# EAGLE board mjoy (EAGLE 4.16)
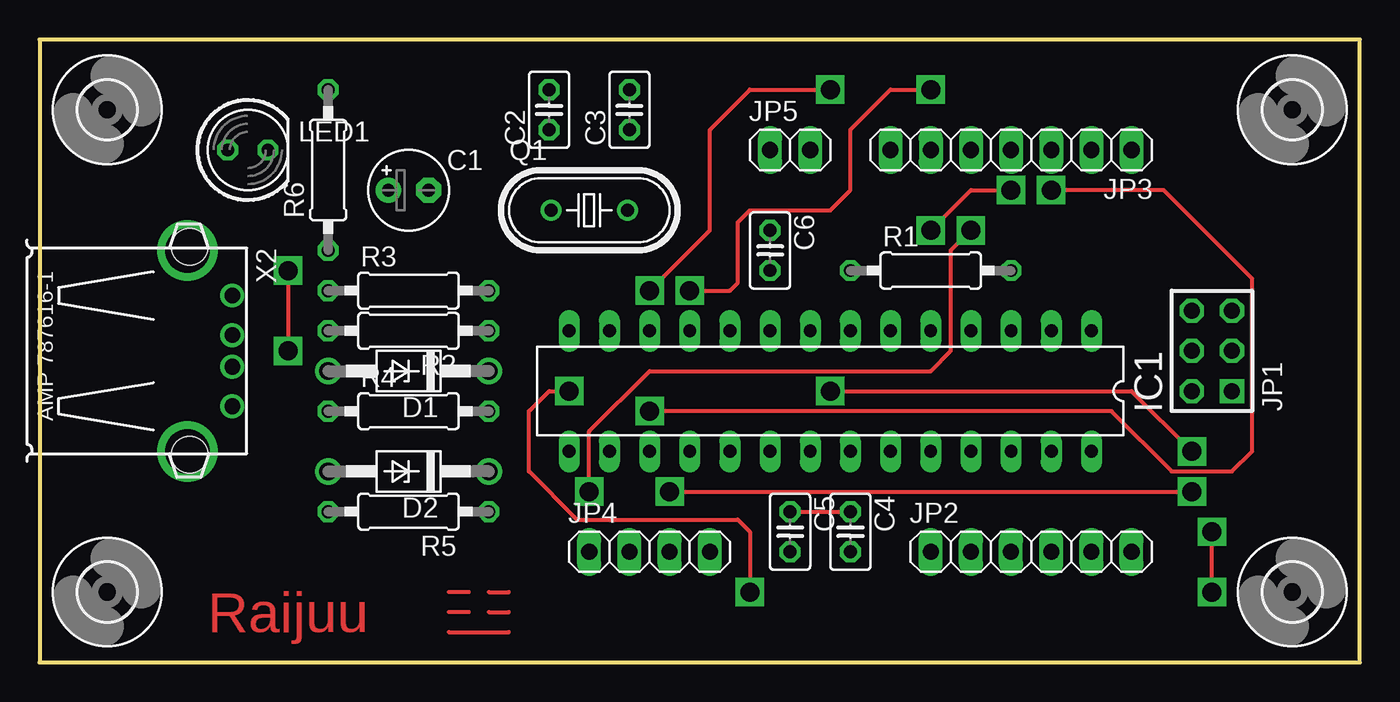
[diagram p0: board, top side]
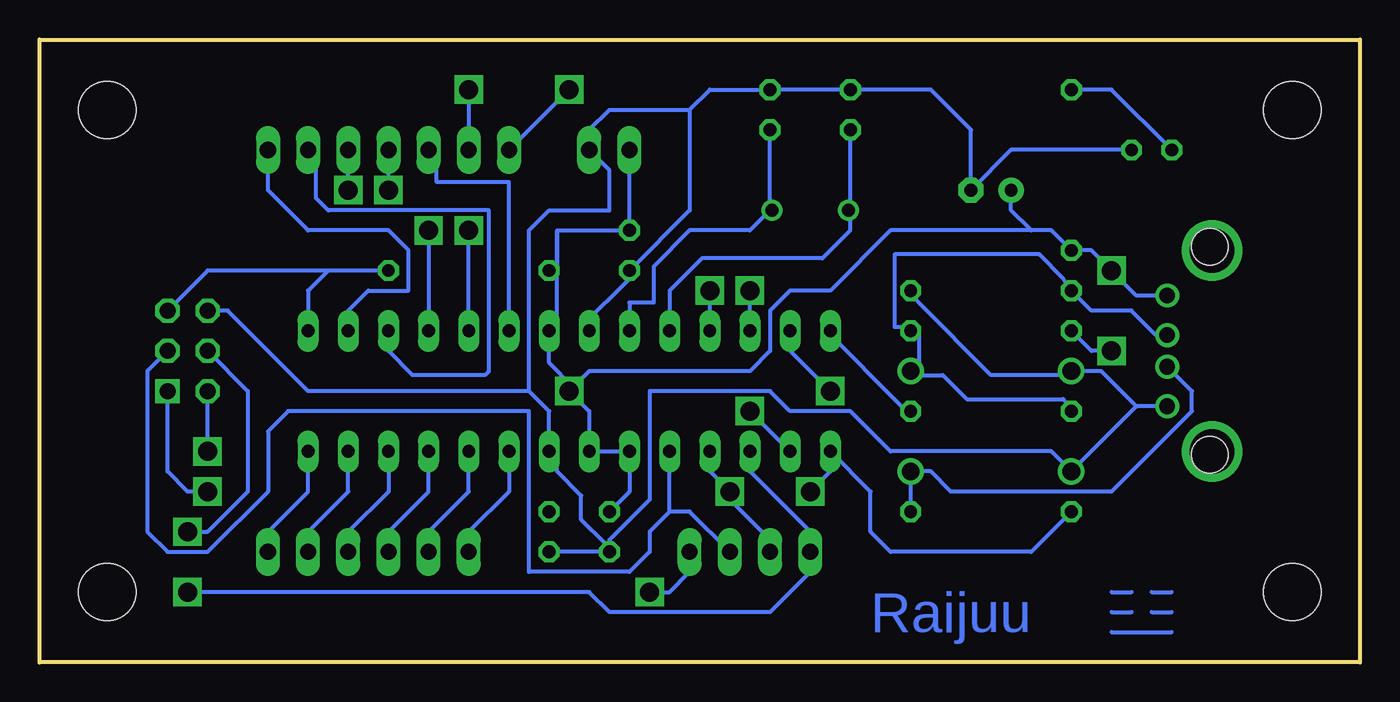
[diagram p1: board, bottom side, seen from below]

Size 83.49 x 39.36 mm. Coordinates in mm from the lower left corner, seen from the top.
Outline: 0,0 83.49,0 83.49,39.36 0,39.36 0,0
Copper layers (1*16): Top 0.035mm / dielectric 1.5mm / Bottom 0.035mm
Design rules "default": minimum track width 10mil, minimum drill 24mil, track to track 8mil, track to pad 8mil, pad to pad 8mil, via to via 8mil, smd to smd 8mil, copper to edge 40mil, drill to drill 8mil, minimum pad ring 10mil, minimum via ring 8mil, stop-mask expansion 4mil, vias tented up to drill 0mil, thermal gap 10mil

## Footprints (pad centres in the part's own frame; a part is rotated, then mirrored left to right if it is on the bottom)
E2,5-5 = drill 0.813 pad 1.6 round: + -1.27,0 | drill 0.813 pad 1.6 octagon: - 1.27,0
C025-025X050 = drill 0.813 octagon: 1 -1.27,0; 2 1.27,0
DO41Z10 = drill 1.118 round: A 5.08,0; C -5.08,0
DIL28-3 = drill 0.813 long: 1 -16.51,-3.81; 2 -13.97,-3.81; 3 -11.43,-3.81; 4 -8.89,-3.81; 5 -6.35,-3.81; 6 -3.81,-3.81; 7 -1.27,-3.81; 8 1.27,-3.81; 9 3.81,-3.81; 10 6.35,-3.81; 11 8.89,-3.81; 12 11.43,-3.81; 13 13.97,-3.81; 14 16.51,-3.81; 15 16.51,3.81; 16 13.97,3.81; 17 11.43,3.81; 18 8.89,3.81; 19 6.35,3.81; 20 3.81,3.81; 21 1.27,3.81; 22 -1.27,3.81; 23 -3.81,3.81; 24 -6.35,3.81; 25 -8.89,3.81; 26 -11.43,3.81; 27 -13.97,3.81; 28 -16.51,3.81
AVR-ISP-6 = drill 1.016 square: 1 -2.54,-1.27 | drill 1.016 octagon: 2 -2.54,1.27; 3 0,-1.27; 4 0,1.27; 5 2.54,-1.27; 6 2.54,1.27
1X06 = drill 1.016 long: 1 -6.35,0; 2 -3.81,0; 3 -1.27,0; 4 1.27,0; 5 3.81,0; 6 6.35,0
1X07 = drill 1.016 long: 1 -7.62,0; 2 -5.08,0; 3 -2.54,0; 4 0,0; 5 2.54,0; 6 5.08,0; 7 7.62,0
1X04 = drill 1.016 long: 1 -3.81,0; 2 -1.27,0; 3 1.27,0; 4 3.81,0
1X02 = drill 1.016 long: 1 -1.27,0; 2 1.27,0
LED5MM = drill 0.813 octagon: A -1.27,0; K 1.27,0
HC49U70 = drill 0.813 round: 1 -2.413,0; 2 2.413,0
0207/10 = drill 0.813 octagon: 1 -5.08,0; 2 5.08,0
3,6 = hole 3.6: 0,0
USB = drill 1 round: 1 -3.5,12.99; 2 -1,12.99; 3 1,12.99; 4 3.5,12.99 | hole 2.3: -6.57,10.28; 6.57,10.28

## Placement (x,y rotation side)
C1  10uF  [E2,5-5]  23.33,29.84 0 top
C2  15pF  [C025-025X050]  32.22,34.92 90 top
C3  15pF  [C025-025X050]  37.3,34.92 90 top
C4  0.1uF  [C025-025X050]  51.27,8.25 270 top
C5  0.1uF  [C025-025X050]  47.46,8.25 270 top
C6  0.1uF  [C025-025X050]  46.19,26.03 270 top
D1  3.3V  [DO41Z10]  23.33,18.41 180 top
D2  3.3V  [DO41Z10]  23.33,12.06 180 top
IC1  MEGA8-P  [DIL28-3]  50,17.14 180 top
JP1  AVR-ISP-6  [AVR-ISP-6]  74.13,19.68 90 top
JP2  [1X06]  62.7,6.98 0 top
JP3  [1X07]  61.43,32.38 180 top
JP4  [1X04]  38.57,6.98 0 top
JP5  [1X02]  47.46,32.38 0 top
LED1  [LED5MM]  13.17,32.38 0 top
Q1  12MHz  [HC49U70]  34.76,28.57 0 top
R1  10K  [0207/10]  56.35,24.76 0 top
R2  2.2K  [0207/10]  23.33,20.95 180 top
R3  4.7K  [0207/10]  23.33,23.49 0 top
R4  82  [0207/10]  23.33,15.87 0 top
R5  82  [0207/10]  23.33,9.52 180 top
R6  1K  [0207/10]  18.25,31.11 90 top
U$1  [3,6]  4.28,4.44 0 top
U$2  [3,6]  79.21,34.92 0 top
U$3  [3,6]  4.28,34.92 0 top
U$4  [3,6]  79.21,4.44 0 top
X2  [USB]  -0.8,19.68 270 top

## Library data of the parts
C1-C6 R1-R6 = rcl
D1 D2 = diode
IC1 = atmel
JP1 = atmel-1
JP2-JP5 = pinhead
LED1 U$1-U$4 = Basic
Q1 = crystal
X2 = con-amp

## Nets
+5V: C1.+ C4.1 C5.1 C6.1 IC1.7 IC1.20 IC1.21 JP1.2 JP5.1 R1.1 R2.2 R6.1 X2.1
GND: C1.- C2.2 C3.2 C4.2 C5.2 C6.2 D1.A D2.A IC1.8 IC1.22 JP1.6 JP5.2 LED1.K R3.2 X2.4
N$1: C3.1 IC1.9 Q1.2
N$2: C2.1 IC1.10 Q1.1
N$3: IC1.1 JP1.5 R1.2
N$4: D1.C R2.1 R3.1 R4.1 X2.2
N$5: IC1.14 R4.2
N$6: IC1.4 IC1.15 R5.2
N$7: D2.C R5.1 X2.3
N$8: LED1.A R6.2
N$9: IC1.19 JP1.3 JP4.3
N$10: IC1.17 JP1.4 JP4.1
N$11: IC1.18 JP1.1 JP4.2
N$12: IC1.23 JP2.1
N$13: IC1.24 JP2.2
N$14: IC1.25 JP2.3
N$15: IC1.26 JP2.4
N$16: IC1.27 JP2.5
N$17: IC1.28 JP2.6
N$18: IC1.2 JP3.1
N$19: IC1.3 JP3.2
N$20: IC1.16 JP3.3
N$21: IC1.5 JP3.4
N$22: IC1.6 JP3.5
N$23: IC1.11 JP3.6
N$24: IC1.12 JP3.7
N$25: IC1.13 JP4.4

## Tracks (layer width: path | path; a pad name or v marks a point on that pad's centre or on a via)
+5V  (via drill 1.2)
  Top 0.254: C5.1 C4.1 | v72.86,13.33 69.05,17.14 v50,17.14 | v15.71,24.76 v15.71,19.68
  Bottom 0.254: 50.76,27.3 50.76,21.2 IC1.7 51.27,18.92 49.75,17.39 | 50.76,27.3 C6.1 JP5.1 | 20.79,27.3 29.68,27.3 33.49,23.49 36.03,23.49 37.3,22.22 37.3,19.68 38.57,18.41 48.73,18.41 49.75,17.39 | 50.76,27.3 50.76,24.76 R1.1 | v72.86,13.33 JP1.2 | C1.+ 22.06,28.57 20.79,27.3 | 20.79,27.3 19.52,27.3 R6.1 16.98,26.03 v15.71,24.76 14.13,23.18 X2.1 | v15.71,19.68 16.98,19.68 R2.2 | 49.75,17.39 v50,17.14 48.73,15.87 IC1.21 IC1.20 | IC1.20 46.19,10.79 C5.1 47.46,9.27 47.71,9.01 | 46.19,13.58 IC1.20
GND
  Bottom 0.254: IC1.8 49.24,21.2 46.19,24.25 C6.2 42.38,28.57 42.38,34.92 | R3.2 27.9,22.73 23.33,18.16 18.76,18.16 D1.A 16.36,18.41 14.13,16.18 | D2.A 18.76,12.06 | C5.2 47.71,7.49 49.24,9.01 49.24,10.54 50.76,12.06 50.76,13.58 IC1.22 51.27,15.87 52.54,17.14 | C5.2 C4.2 | 42.38,34.92 47.46,34.92 48.73,33.65 JP5.2 47.46,31.11 47.46,28.57 51.27,28.57 52.54,27.3 52.54,17.14 | C5.2 47.46,7.74 44.92,10.28 44.92,17.14 37.3,17.14 36.03,15.87 32.22,15.87 29.68,13.33 19.52,13.33 D2.A | X2.4 14.13,16.18 | 14.13,16.18 D2.A | LED1.K 22.06,32.38 C1.- 24.6,33.65 27.14,36.19 C2.2 C3.2 41.11,36.19 42.38,34.92 | 52.54,17.14 66.51,17.14 71.59,22.22 JP1.6
N$1
  Bottom 0.254: IC1.9 46.19,22.73 44.67,22.73 44.67,25.01 42.38,27.3 38.57,27.3 37.3,28.57 | Q1.2 37.3,28.57 | 37.3,28.57 C3.1
N$2
  Bottom 0.254: IC1.10 43.65,23.49 41.62,25.52 34,25.52 32.22,27.3 32.22,28.57 | 32.22,28.57 Q1.1 | 32.22,28.57 C2.1
N$3
  Bottom 0.254: R1.2 65.24,24.76 | 65.24,24.76 72.86,24.76 JP1.5 | IC1.1 66.51,23.49 65.24,24.76
N$4
  Bottom 0.254: 27.9,18.16 26.38,18.16 24.85,16.63 18.76,16.63 R4.1 | 27.9,21.2 27.9,18.16 | 27.9,18.16 D1.C | 27.9,21.2 29.43,21.2 29.43,25.78 20.28,25.78 18.76,24.25 R3.1 16.98,22.22 14.44,22.22 12.9,20.68 X2.2 | 27.9,21.2 R2.1
N$5
  Bottom 0.254: IC1.14 34,21.2 28.66,15.87 R4.2
N$6  (via drill 1.2)
  Top 0.254: v34.76,10.79 34.76,14.6 38.57,18.41 56.35,18.41 57.62,19.68 57.62,26.03 v58.89,27.3
  Bottom 0.254: R5.2 20.79,6.98 29.68,6.98 30.95,8.25 30.95,10.79 IC1.15 33.49,12.06 v34.76,10.79 | v58.89,27.3 IC1.4
N$7
  Top 0.254: D2.C 27.9,12.06
  Bottom 0.254: R5.1 D2.C 27.14,12.06 25.87,10.79 15.71,10.79 10.63,15.87 10.63,17.14 12.17,18.68 X2.3
N$8
  Bottom 0.254: LED1.A 15.71,36.19 R6.2
N$9
  Bottom 0.254: JP1.3 76.67,18.41 76.67,8.25 75.4,6.98 72.86,6.98 69.05,10.79 69.05,14.6 67.78,15.87 52.54,15.87 52.54,5.71 46.19,5.71 44.92,6.98 44.92,8.25 43.65,9.52 | JP4.3 42.38,9.52 43.65,9.52 | 43.65,9.52 IC1.19
N$10  (via drill 1.2)
  Top 0.254: v74.13,4.44 v74.13,8.25
  Bottom 0.254: IC1.17 38.57,12.06 34.76,8.25 JP4.1 34.76,5.71 37.3,3.17 47.46,3.17 48.73,4.44 v74.13,4.44 | v74.13,8.25 72.86,8.25 70.32,10.79 70.32,17.14 JP1.4
N$11  (via drill 1.2)
  Top 0.254: v39.84,10.79 v72.86,10.79
  Bottom 0.254: JP4.2 37.05,7.49 40.09,10.54 v39.84,10.79 41.11,12.06 IC1.18 | v72.86,10.79 74.13,10.79 75.4,12.06 JP1.1
N$12
  Bottom 0.254: IC1.23 53.81,10.79 56.35,8.25 JP2.1
N$13
  Bottom 0.254: JP2.2 58.89,8.25 56.35,10.79 IC1.24
N$14
  Bottom 0.254: JP2.3 61.43,8.25 58.89,10.79 IC1.25
N$15
  Bottom 0.254: IC1.26 61.43,10.79 63.97,8.25 JP2.4
N$16
  Bottom 0.254: JP2.5 66.51,8.25 63.97,10.79 IC1.27
N$17
  Bottom 0.254: JP2.6 69.05,8.25 66.51,10.79 IC1.28
N$18
  Bottom 0.254: 69.05,31.87 JP3.1 69.05,29.84 66.51,27.3 61.43,27.3 60.16,26.03 60.16,23.49 62.7,23.49 63.97,22.22 IC1.2
N$19
  Bottom 0.254: IC1.3 61.43,19.68 59.91,18.16 55.33,18.16 55.08,18.41 55.08,28.57 65.24,28.57 66,29.33 66,31.87 JP3.2
N$20  (via drill 1.2)
  Top 0.254: v63.97,29.84 71.08,29.84 76.67,24.25 76.67,13.33 75.4,12.06 71.59,12.06 67.78,15.87 v38.57,15.87
  Bottom 0.254: v63.97,29.84 JP3.3 | v38.57,15.87 IC1.16
N$21  (via drill 1.2)
  Top 0.254: v56.35,27.3 58.89,29.84 v61.43,29.84
  Bottom 0.254: IC1.5 v56.35,27.3 | v61.43,29.84 JP3.4
N$22
  Bottom 0.254: IC1.6 53.81,30.35 58.38,30.35 58.38,31.87 JP3.5
N$23  (via drill 1.2)
  Top 0.254: v56.35,36.19 53.81,36.19 51.27,33.65 51.27,29.84 50,28.57 44.92,28.57 44.16,27.81 44.16,24 43.65,23.49 v41.11,23.49
  Bottom 0.254: v56.35,36.19 JP3.6 | IC1.11 v41.11,23.49
N$24  (via drill 1.2)
  Top 0.254: v50,36.19 44.92,36.19 42.38,33.65 42.38,27.3 v38.57,23.49
  Bottom 0.254: IC1.12 v38.57,23.49 | v50,36.19 JP3.7
N$25  (via drill 1.2, 1.2 pad 0.3)
  Top 0.254: v44.92,4.44 44.92,8.25 44.16,9.01 34,9.01 30.95,12.06 30.95,15.87 32.22,17.14 v33.49,17.14
  Bottom 0.254: IC1.13 36.03,19.68 v33.49,17.14 | v44.92,4.44 43.65,4.44 42.38,5.71 JP4.4
N$26  (via drill 2.8 pad 3.81)
  other vias: 9.36,26.03
N$27  (via drill 2.8 pad 3.81)
  other vias: 9.36,13.33
N$29
  Bottom 0.254: 15.71,1.9 11.9,1.9
N$30
  Bottom 0.254: 15.71,3.17 14.44,3.17
N$31
  Bottom 0.254: 13.17,3.17 11.9,3.17
N$32
  Bottom 0.254: 15.71,4.44 14.44,4.44
N$33
  Bottom 0.254: 13.17,4.44 11.9,4.44
N$34
  Top 0.254: 25.87,1.9 29.68,1.9
N$35
  Top 0.254: 28.41,3.17 29.68,3.17
N$36
  Top 0.254: 28.41,4.44 29.68,4.44
N$37
  Top 0.254: 27.14,4.44 25.87,4.44
N$38
  Top 0.254: 27.14,3.17 25.87,3.17

## Text on the board
Top: Raijuu
Bottom: Raijuu